# Altium PCB PnP.PcbDoc (part 3 of 5)
Units mm, origin at the board's own origin, x right, y up, seen from the top; angles counter-clockwise.
Board outline 95 x 65 mm, 6 copper layers (Top Layer, L2 - GND, L3 - PWR, L4 - Sig, L5 - GND, Bottom Layer), stack 1.538 mm thick; 358 components, 260 nets, 1269 pads, 686 vias.
Unrouted connection lines stored in the file: 161.
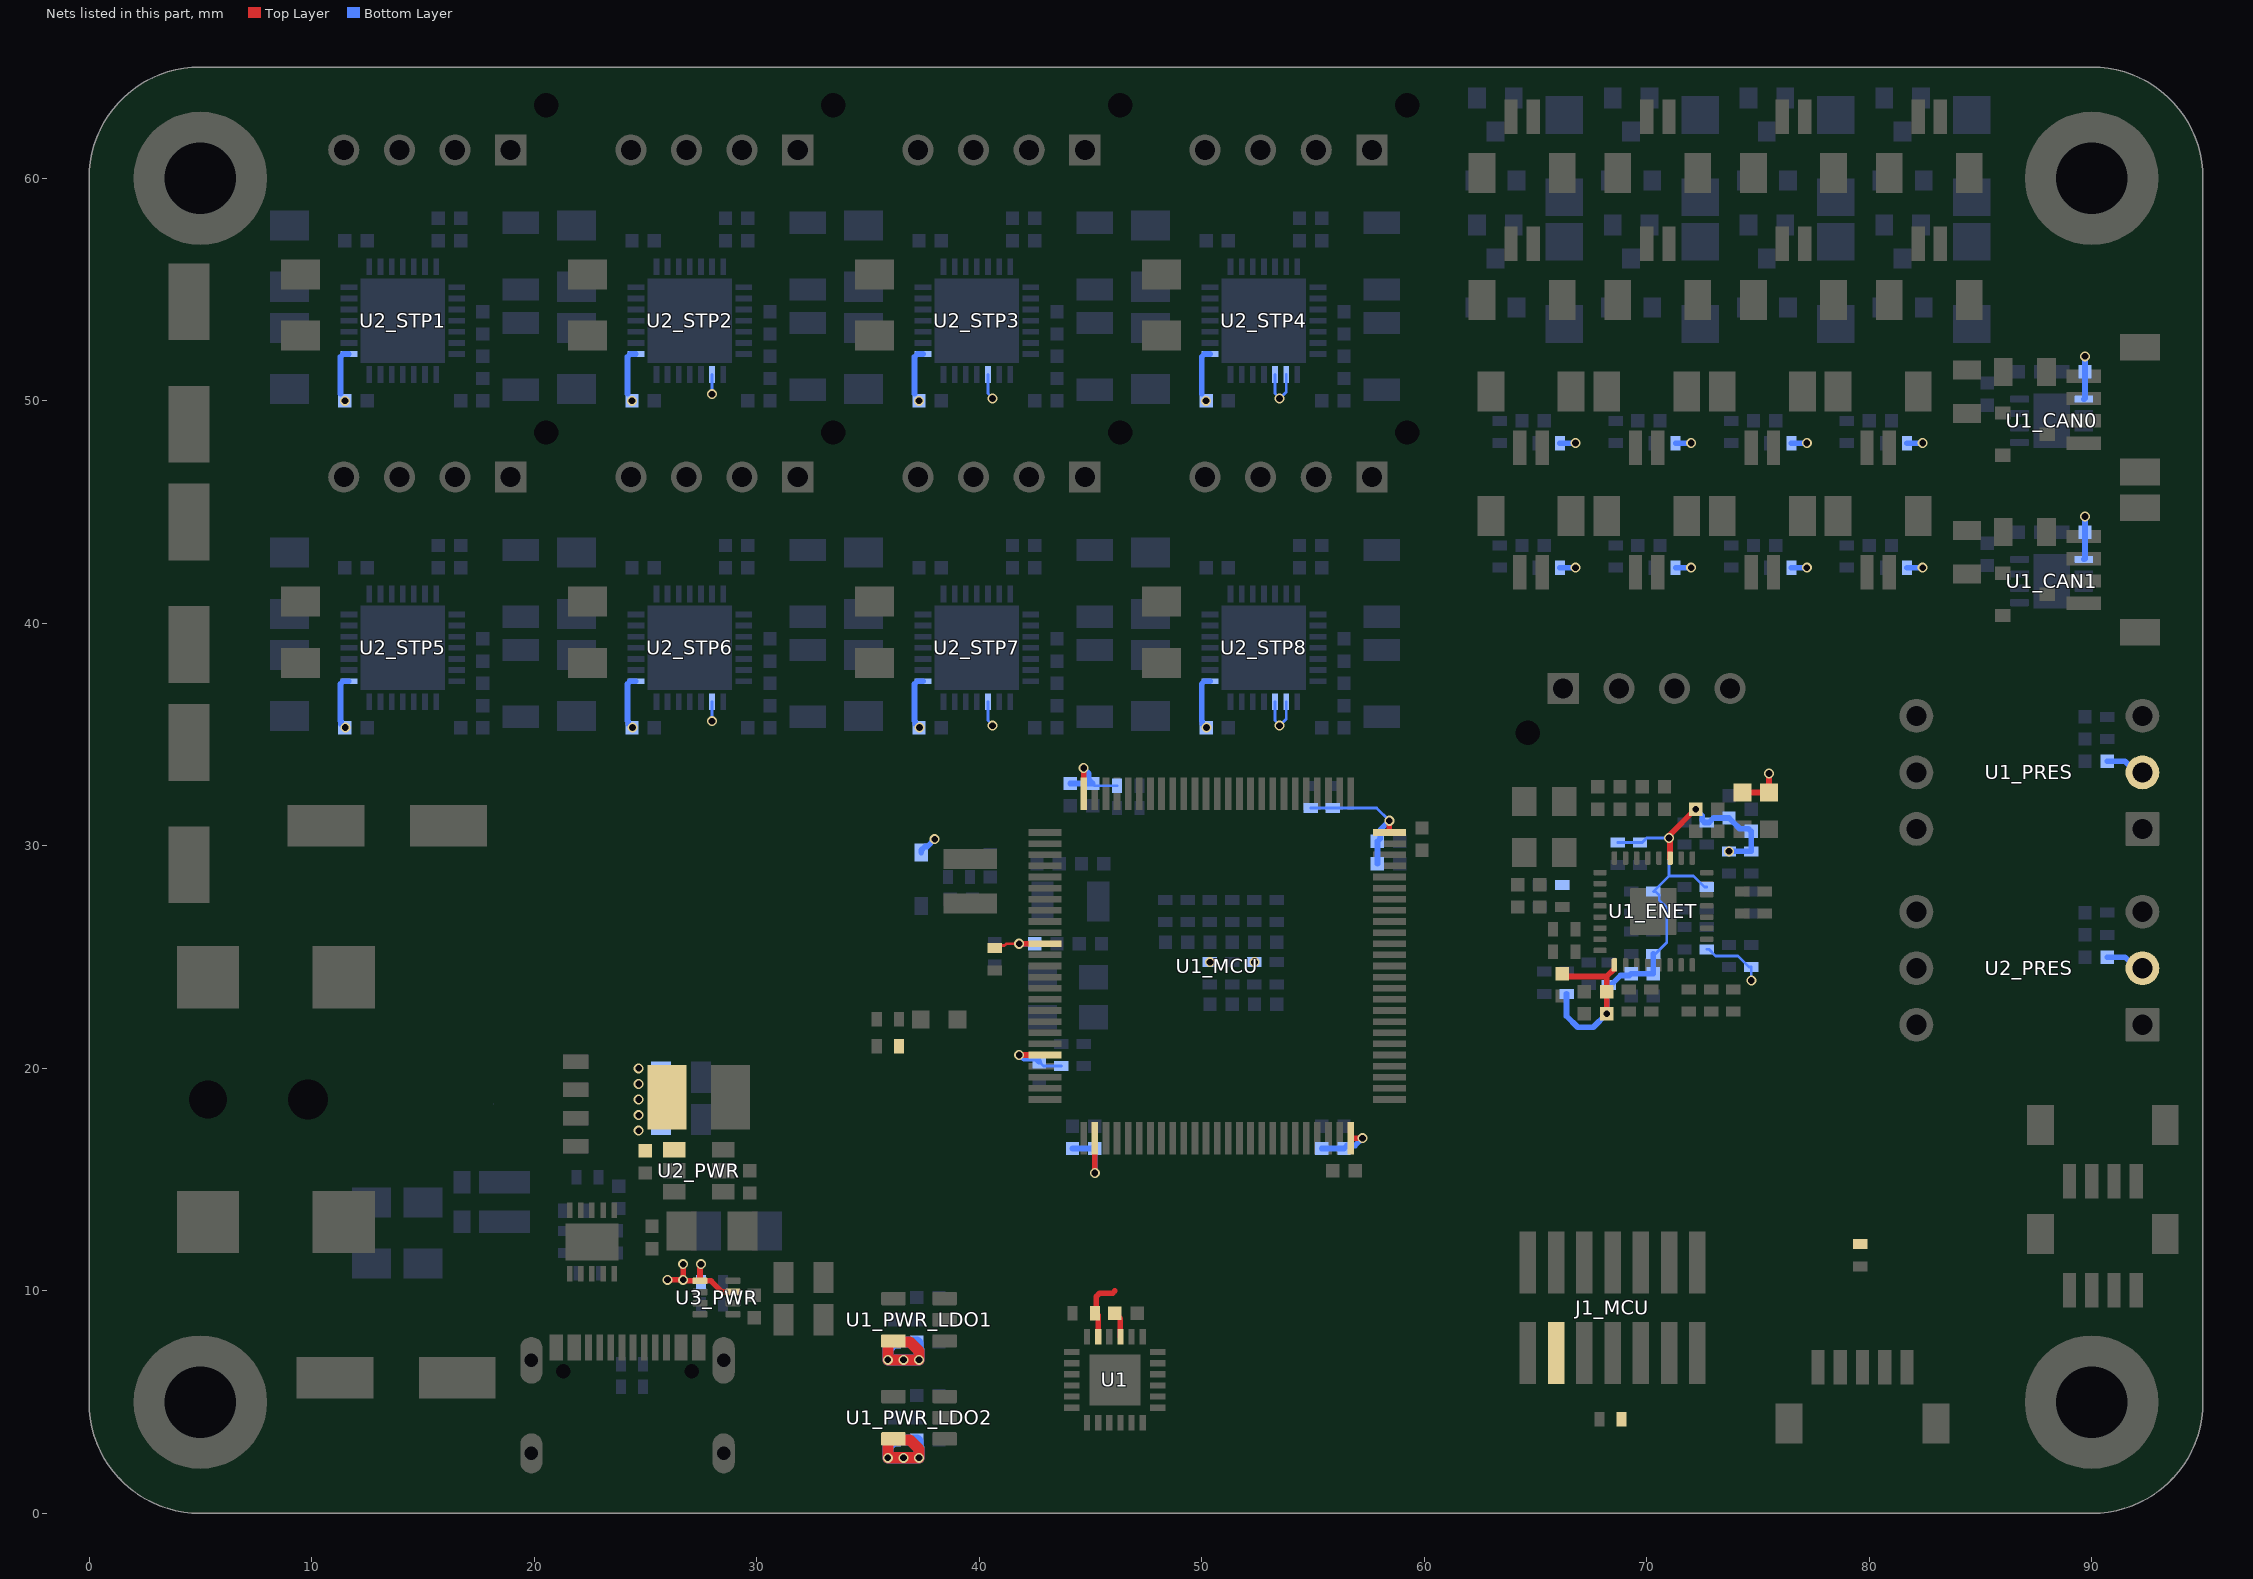
[diagram p6: the nets of this part, all layers, seen from the top]

## Via types
v1: diameter 0.45, hole 0.3, Top Layer to Bottom Layer, tented both sides, 674 vias
v2: diameter 0.55, hole 0.4, Top Layer to Bottom Layer, tented both sides, 12 vias

## Nets (pads, with @x,y where several pads share a name; then routed paths per layer and width w, separated by ;. In a path a pad name is that pad's centre, name@x,y a point inside that pad or via, vN(x,y) a via of type N, cw(c..) or ccw(c..) an arc to the next point about the centre after c; other vN are vias at no path point) (continued)
3V3_LOGIC: (continued)
  Bottom Layer w0.5: v1(35.9,2.5) v1(36.6,2.5) v1(37.3,2.5) 37.3,2.957 37.25,3.007 37.25,3.25 C4_PWR_LDO2.2@37.2,3.3 C3_PWR_LDO2.2@36.2,3.3 35.9,3 v1(35.9,2.5)
  other v1: 50.375,24.775 75.5,33.25 11.5,50 24.4,50 37.3,50 50.2,50
3V3_MCU: C3_PWR_LDO1.2 C4_PWR_LDO1.2 C9_MCU.2 C10_MCU.2 C11_MCU.2 C12_MCU.2 C13_MCU.2 C14_MCU.2 C15_MCU.2 C16_MCU.2 C17_MCU.2 C18_MCU.2 D1_MCU.2 J1_MCU.3 R1_BTN1.2 R1_BTN2.2 R1_BTN3.2 R1_BTN4.2 R1_BTN5.2 R1_BTN6.2 R1_BTN7.2 R1_BTN8.2 R2_MCU.2 R3_MCU.2 R4_MCU.2 R5_MCU.2 R6_PWR.2 R7_MCU.2 R9_MCU.2 R11_MCU.2 R13_MCU.2 U1_MCU.11 U1_MCU.21 U1_MCU.27 U1_MCU.50 U1_MCU.75 U1_MCU.100 U1_PWR_LDO1.5 | length 38.1
  Top Layer w0.127: R4_MCU.2@40.7,25.4 40.816,25.516 41.141,25.516 41.225,25.6 v1(41.8,25.6)
  Top Layer w0.254: v1(41.8,20.6) U1_MCU.21@42.962,20.6 ; v1(41.8,25.6) U1_MCU.11@42.962,25.6 ; U1_MCU.100@44.7,32.338 v1(44.7,33.5) ; v1(45.2,15.3) U1_MCU.27@45.2,16.862 ; U1_MCU.50@56.7,16.862 v1(57.228,16.862) ; U1_MCU.75@58.438,30.6 v1(58.438,31.128)
  Top Layer w0.5: v1(35.9,6.9) 35.9,7.7 35.95,7.75 U1_PWR_LDO1.5@36.15,7.75 36.2,7.7 36.9,7.7 37.3,7.3 v1(37.3,6.9) v1(36.6,6.9) v1(35.9,6.9)
  Bottom Layer w0.127: C18_MCU.2@42.7,20.3 42.9,20.1 R7_MCU.2@43.7,20.1 ; C13_MCU.2@45.1,32.8 45.2,32.7 R5_MCU.2@46.2,32.7 ; R3_MCU.2@54.9,31.7 R2_MCU.2@55.9,31.7 57.866,31.7 v1(58.438,31.128)
  Bottom Layer w0.254: D1_MCU.2@37.4,29.7 37.4,29.8 37.573,29.973 37.673,29.973 v1(38,30.3) ; v1(41.8,20.6) 41.853,20.6 42.019,20.434 42.566,20.434 C18_MCU.2@42.7,20.3 ; v1(41.8,25.6) C14_MCU.2@42.5,25.6 ; C10_MCU.2@44.1,32.8 C13_MCU.2@45.1,32.8 44.927,32.973 44.927,33.253 44.7,33.48 v1(44.7,33.5) v1@44.725,33.475 ; C11_MCU.2@44.2,16.4 C15_MCU.2@45.2,16.4 v1(45.2,15.3) ; C12_MCU.2@55.4,16.4 C16_MCU.2@56.4,16.4 56.532,16.532 56.898,16.532 v1(57.228,16.862) ; C9_MCU.2@57.9,29.2 C17_MCU.2@57.9,30.2 58.02,30.32 58.02,30.71 v1(58.438,31.128) ; R1_BTN5.2@66.1,42.5 v1(66.8,42.5) ; R1_BTN1.2@66.1,48.1 v1(66.8,48.1) ; R1_BTN6.2@71.3,42.5 v1(72,42.5) ; R1_BTN2.2@71.3,48.1 v1(72,48.1) ; R1_BTN7.2@76.5,42.5 v1(77.2,42.5) ; R1_BTN3.2@76.5,48.1 v1(77.2,48.1) ; R1_BTN8.2@81.7,42.5 v1(82.4,42.5) ; R1_BTN4.2@81.7,48.1 v1(82.4,48.1)
  Bottom Layer w0.5: v1(35.9,6.9) 35.9,7.4 C3_PWR_LDO1.2@36.2,7.7 C4_PWR_LDO1.2@37.2,7.7 37.25,7.65 37.25,7.407 37.3,7.357 v1(37.3,6.9) v1(36.6,6.9) v1(35.9,6.9)
  other v1: 52.375,24.775
5V0_BUCK: C6_PWR.2 C7_PWR.2 C8_PWR.2 L1_PWR.2 R11_PWR.2 U2_PWR.1 U3_PWR.3 U3_PWR.5 | length 4.6
  Top Layer w0.254: v1(26,10.5) v1(26.7,10.5) ; v1(26.7,11.2) v1(26.7,10.5) ; v1(27.5,11.2) 27.5,11.147 27.46,11.107 U3_PWR.5@27.46,10.45 ; U3_PWR.3@28.94,9.95 28.45,9.95 27.95,10.45 U3_PWR.5@27.46,10.45 ; v1(26.7,10.5) 26.753,10.5 26.803,10.45 U3_PWR.5@27.46,10.45
  other v1: 24.7,17.2 24.7,17.9 24.7,18.6 24.7,19.3 24.7,20